# EAGLE board V3.1_Radio_Stack_Breakout_System_v46 (EAGLE 9.7.0), part 1 of 2
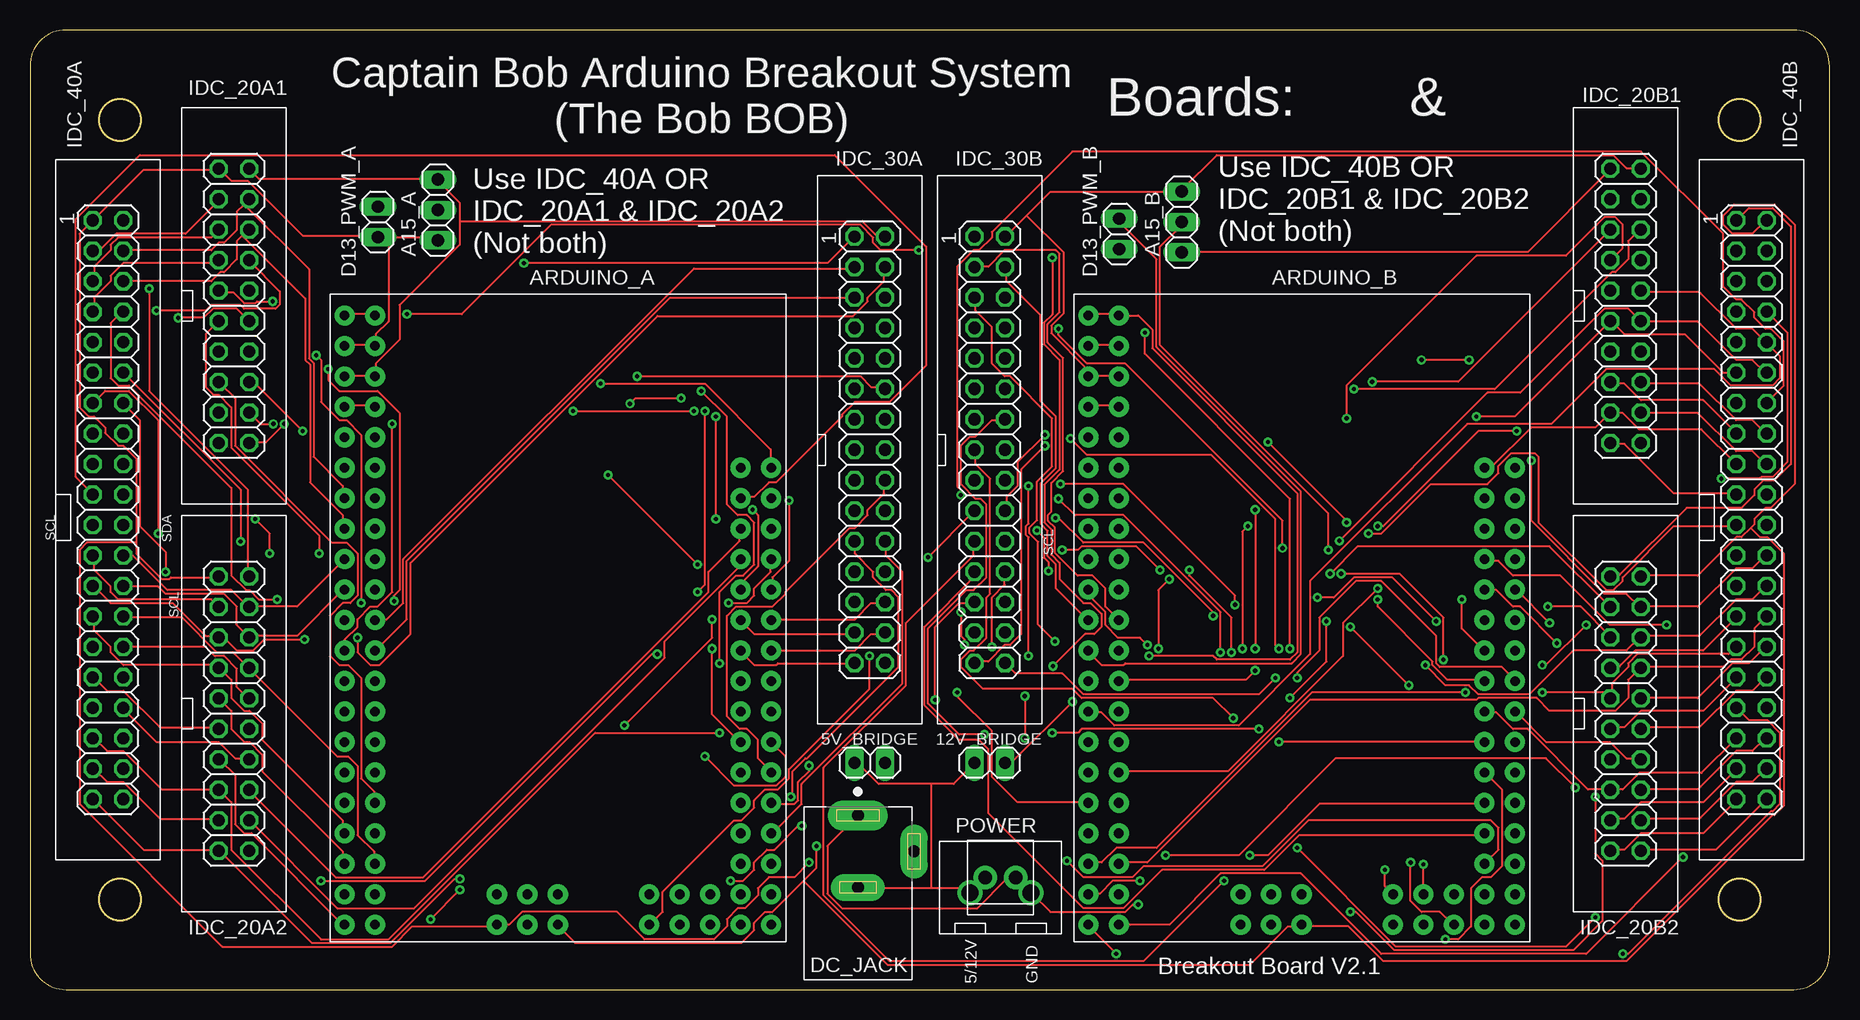
[diagram p0: board, top side]
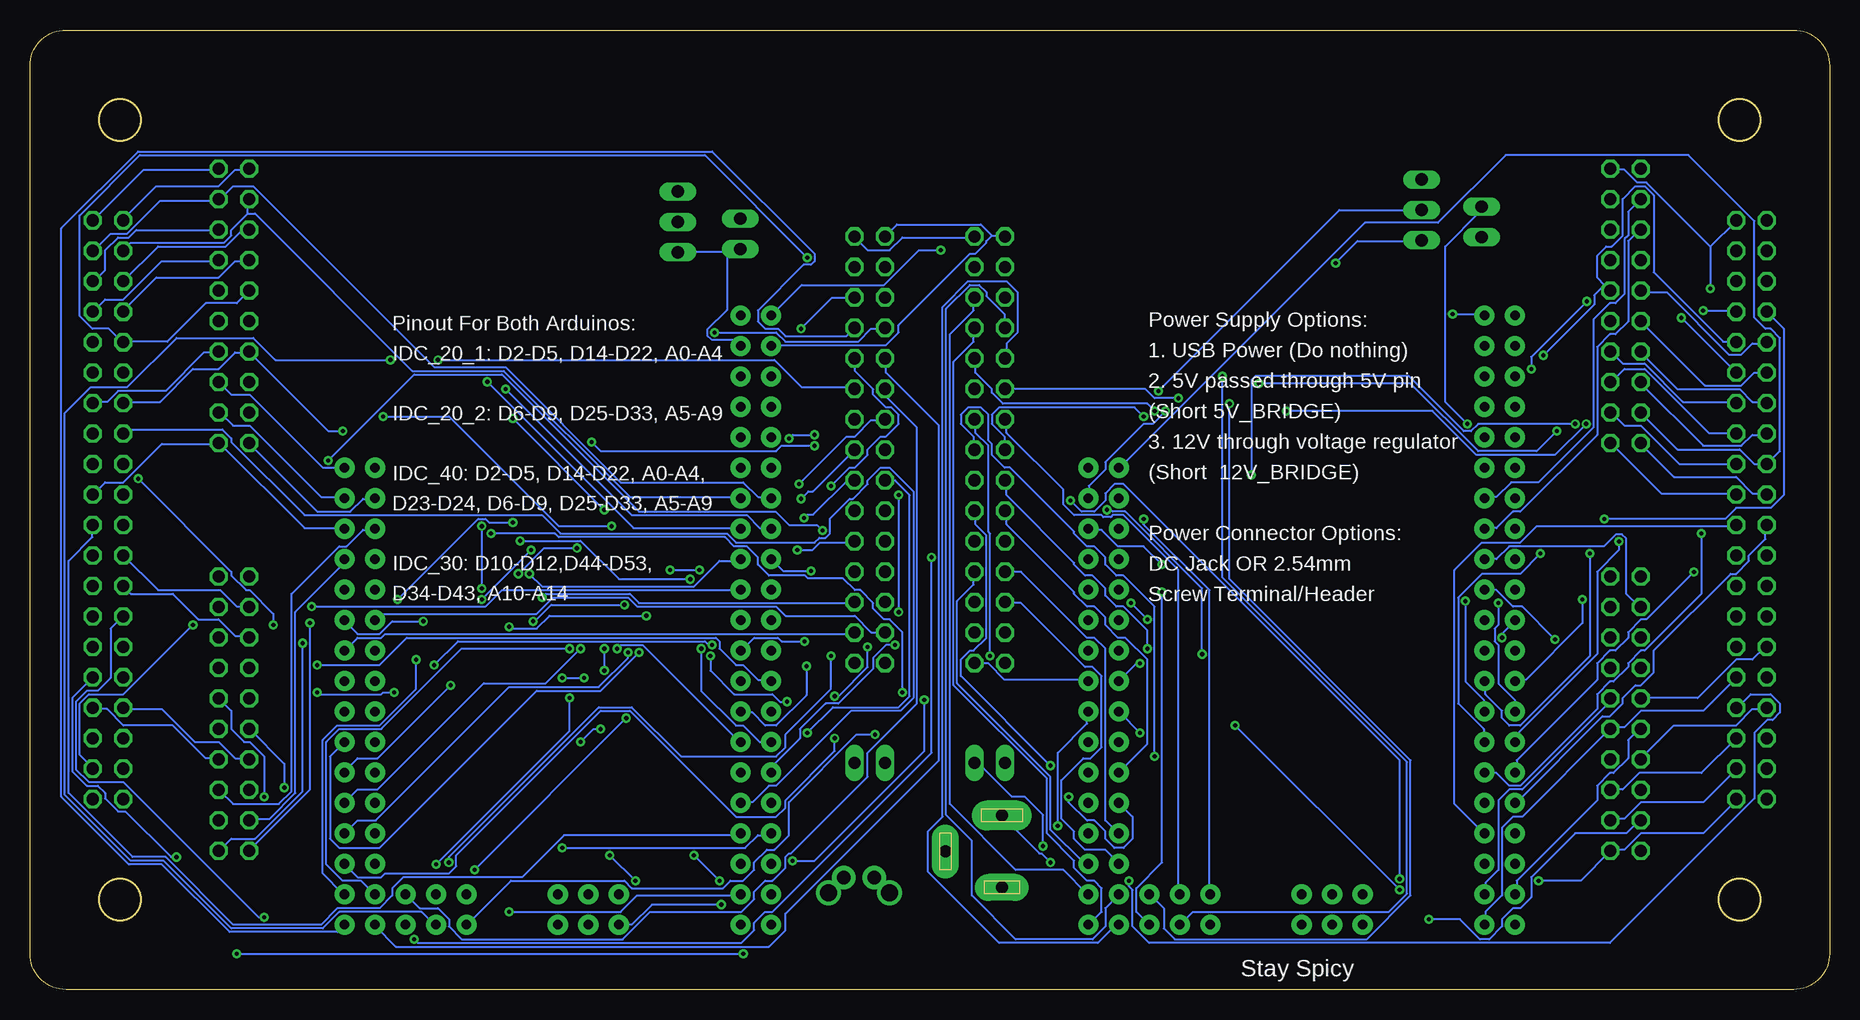
[diagram p1: board, bottom side, seen from below]

Size 150 x 80 mm. Coordinates in mm from the lower left corner, seen from the top.
Outline: 147,0 arc90 150,3 150,77 arc90 147,80 3,80 arc90 0,77 0,3 arc90 3,0 147,0
Outline: circle at 7.5,7.5 radius 1.75
Outline: circle at 142.5,72.5 radius 1.75
Outline: circle at 142.5,7.5 radius 1.75
Outline: circle at 7.5,72.5 radius 1.75
Copper layers (1*16): Top 0.035mm / dielectric 1.5mm / Bottom 0.035mm
Design rules "Fusion Electronics Design Rules": minimum track width 6mil, minimum drill 0.35mm, track to track 6mil, track to pad 6mil, pad to pad 6mil, via to via 6mil, smd to smd 6mil, copper to edge 40mil, drill to drill 6mil, minimum pad ring 10mil, minimum via ring 8mil, stop-mask expansion 4mil, vias tented up to drill 0mil, thermal gap 10mil

## Footprints (pad centres in the part's own frame; a part is rotated, then mirrored left to right if it is on the bottom)
1X02 = drill 1.016 long: 1 -1.27,0; 2 1.27,0
1X03 = drill 1.016 long: 1 -2.54,0; 2 0,0; 3 2.54,0
MODULE_MEGA_PRO_EMBED_CH340G_/_ATMEGA2560 = drill 0.8 pad 1.676: 3V3_1 -17.58,-17.78; 3V3_2 -17.58,-15.24; 5V_1 -20.12,-17.78; 5V_2 -20.12,-15.24; 5V_3 25.6,0; A0 -12.5,17.78; A1 -12.5,15.24; A2 -9.96,17.78; A3 -9.96,15.24; A4 -7.42,17.78; A5 -7.42,15.24; A6 -4.88,17.78; A7 -4.88,15.24; A8 -2.34,17.78; A9 -2.34,15.24; A10 0.2,17.78; A11 0.2,15.24; A12 2.74,17.78; A13 2.74,15.24; A14 5.28,17.78; A15 5.28,15.24; AREF -15.04,-15.24; D2 -9.96,-15.24; D3 -9.96,-17.78; D4 -7.42,-15.24; D5 -7.42,-17.78; D6 -4.88,-15.24; D7 -4.88,-17.78; D8 -2.34,-15.24; D9 -2.34,-17.78; D10 0.2,-15.24; D11 0.2,-17.78; D12 2.74,-15.24; D13 2.74,-17.78; D14 5.28,-15.24; D15 5.28,-17.78; D16 7.82,-15.24; D17 7.82,-17.78; D18 10.36,-15.24; D19 10.36,-17.78; D20 12.9,-15.24; D21 12.9,-17.78; D22 15.44,-15.24; D23 15.44,-17.78; D24 17.98,-15.24; D25 17.98,-17.78; D26 20.52,-15.24; D27 20.52,-17.78; D28 23.06,-15.24; D29 23.06,-17.78; D30 25.6,-15.24; D31 25.6,-17.78; D32 7.82,17.78; D33 7.82,15.24; D34 10.36,17.78; D35 10.36,15.24; D36 12.9,17.78; D37 12.9,15.24; D38 15.44,17.78; D39 15.44,15.24; D40 17.98,17.78; D41 17.98,15.24; D42 20.52,17.78; D43 20.52,15.24; D44 23.06,17.78; D45 23.06,15.24; D46 25.6,17.78; D47 25.6,15.24; D48 25.6,12.7; D49 23.06,12.7; D50 25.6,10.16; D51 23.06,10.16; D52 25.6,7.62; D53 23.06,7.62; GND_1 -22.66,-17.78; GND_2 -22.66,-15.24; GND_3 25.6,-5.08; MISO 23.06,0; MOSI 25.6,-2.54; RESET 23.06,-5.08; RST -15.04,-17.78; RX -12.5,-15.24; SCK 23.06,-2.54; TX -12.5,-17.78; VIN_1 -25.2,-17.78; VIN_2 -25.2,-15.24
CUI_PJ-002AH = drill 1 pad 2.5 long: 1 0,0 | drill 1 pad 2.25 long: 2 6,0; 3 3,4.7
2X10 = drill 1.016 octagon: 1 -11.43,-1.27; 2 -11.43,1.27; 3 -8.89,-1.27; 4 -8.89,1.27; 5 -6.35,-1.27; 6 -6.35,1.27; 7 -3.81,-1.27; 8 -3.81,1.27; 9 -1.27,-1.27; 10 -1.27,1.27; 11 1.27,-1.27; 12 1.27,1.27; 13 3.81,-1.27; 14 3.81,1.27; 15 6.35,-1.27; 16 6.35,1.27; 17 8.89,-1.27; 18 8.89,1.27; 19 11.43,-1.27; 20 11.43,1.27
2X15_IDC_30 = drill 1.016 octagon: 1 -17.78,-1.27; 2 -17.78,1.27; 3 -15.24,-1.27; 4 -15.24,1.27; 5 -12.7,-1.27; 6 -12.7,1.27; 7 -10.16,-1.27; 8 -10.16,1.27; 9 -7.62,-1.27; 10 -7.62,1.27; 11 -5.08,-1.27; 12 -5.08,1.27; 13 -2.54,-1.27; 14 -2.54,1.27; 15 0,-1.27; 16 0,1.27; 17 2.54,-1.27; 18 2.54,1.27; 19 5.08,-1.27; 20 5.08,1.27; 21 7.62,-1.27; 22 7.62,1.27; 23 10.16,-1.27; 24 10.16,1.27; 25 12.7,-1.27; 26 12.7,1.27; 27 15.24,-1.27; 28 15.24,1.27; 29 17.78,-1.27; 30 17.78,1.27
IDC_40_2X20 = drill 1.016 octagon: 1 -24.13,-1.27; 2 -24.13,1.27; 3 -21.59,-1.27; 4 -21.59,1.27; 5 -19.05,-1.27; 6 -19.05,1.27; 7 -16.51,-1.27; 8 -16.51,1.27; 9 -13.97,-1.27; 10 -13.97,1.27; 11 -11.43,-1.27; 12 -11.43,1.27; 13 -8.89,-1.27; 14 -8.89,1.27; 15 -6.35,-1.27; 16 -6.35,1.27; 17 -3.81,-1.27; 18 -3.81,1.27; 19 -1.27,-1.27; 20 -1.27,1.27; 21 1.27,-1.27; 22 1.27,1.27; 23 3.81,-1.27; 24 3.81,1.27; 25 6.35,-1.27; 26 6.35,1.27; 27 8.89,-1.27; 28 8.89,1.27; 29 11.43,-1.27; 30 11.43,1.27; 31 13.97,-1.27; 32 13.97,1.27; 33 16.51,-1.27; 34 16.51,1.27; 35 19.05,-1.27; 36 19.05,1.27; 37 21.59,-1.27; 38 21.59,1.27; 39 24.13,-1.27; 40 24.13,1.27
1X2_2.54&5.08MM = drill 1.15 pad 1.93: 1 1.27,-1.27; 2 -1.27,-1.27 | drill 1.4: P$1 2.54,-2.54; P$2 -2.54,-2.54

## Placement (x,y rotation side)
5V_BRIDGE  [1X02]  70,18.9 0 top
12V_BRIDGE  [1X02]  80,18.9 180 top
A15_A  [1X03]  34,65 90 top
A15_B  [1X03]  96,64 90 top
ARDUINO_A  MEGA_PRO_EMBED_CH340G_/_ATMEGA2560  [MODULE_MEGA_PRO_EMBED_CH340G_/_ATMEGA2560]  44,31 270 top
ARDUINO_B  MEGA_PRO_EMBED_CH340G_/_ATMEGA2560  [MODULE_MEGA_PRO_EMBED_CH340G_/_ATMEGA2560]  106,31 270 top
D13_PWM_A  [1X02]  29,64 90 top
D13_PWM_B  [1X02]  90.8,63 90 top
DC_JACK  DC-PJ-002AH_DC_JACK  [CUI_PJ-002AH]  69,14.52 270 top
IDC_20A1  [2X10]  17,57 270 top
IDC_20A2  [2X10]  17,23 270 top
IDC_20B1  [2X10]  133,57 270 top
IDC_20B2  [2X10]  133,23 270 top
IDC_30A  [2X15_IDC_30]  70,45 270 top
IDC_30B  [2X15_IDC_30]  80,45 270 top
IDC_40A  IDC_40_PINHD-2X20  [IDC_40_2X20]  6.5,40 270 top
IDC_40B  IDC_40_PINHD-2X20  [IDC_40_2X20]  143.5,40 270 top
POWER  2.54MMAND5.08MM_SCREW_TERMINAL2.54&5.08  [1X2_2.54&5.08MM]  80.9,10.6 0 top

## Library data of the parts
5V_BRIDGE 12V_BRIDGE A15_A A15_B D13_PWM_A D13_PWM_B = pinhead
ARDUINO_A ARDUINO_B = SnapEDA Library; MANUFACTURER: Robotdyn; PARTREV: 12/May/2017; STANDARD: Manufacturer Recommendations
DC_JACK = CaptainBobSim Library, custom; MANUFACTURER: CUI INC; STANDARD: Manufacturer recommendations
IDC_20A1 IDC_20A2 IDC_20B1 IDC_20B2 IDC_30A IDC_30B POWER = CaptainBobSim Library, custom
IDC_40A IDC_40B = CaptainBobSim Library, custom; CATEGORY: Headers; DESCRIPTION: Header, Straight, 2x20 Position; MANUFACTURER: Generic; MPN: Generic; OPERATING_TEMPERATURE: Generic; PART_STATUS: Active; PITCH: 0.100" (2.54mm); ROHS_COMPLIANCE: Generic; SERIES: Generic; SUB-CATEGORY: Headers, Male Pins; TYPE: Board to Board or Cable, Unshrouded, Through Hole, Straight

## Nets
+5V: 5V_BRIDGE.2 A15_A.3 A15_B.3 ARDUINO_A.5V_1 ARDUINO_A.5V_2 ARDUINO_A.5V_3 ARDUINO_B.5V_1 ARDUINO_B.5V_2 ARDUINO_B.5V_3 IDC_20A1.2 IDC_20A2.2 IDC_20B1.2 IDC_20B2.2 IDC_30A.2 IDC_30B.2 IDC_40A.2 IDC_40B.2
+12V: 12V_BRIDGE.1 ARDUINO_A.VIN_1 ARDUINO_A.VIN_2 ARDUINO_B.VIN_1 ARDUINO_B.VIN_2
A_3V3: ARDUINO_A.3V3_1 ARDUINO_A.3V3_2
A_A0: ARDUINO_A.A0 IDC_20A1.16 IDC_40A.16
A_A1: ARDUINO_A.A1 IDC_20A1.17 IDC_40A.17
A_A2: ARDUINO_A.A2 IDC_20A1.18 IDC_40A.18
A_A3: ARDUINO_A.A3 IDC_20A1.19 IDC_40A.19
A_A4: ARDUINO_A.A4 IDC_20A1.20 IDC_40A.20
A_A5: ARDUINO_A.A5 IDC_20A2.16 IDC_40A.36
A_A6: ARDUINO_A.A6 IDC_20A2.17 IDC_40A.37
A_A7: ARDUINO_A.A7 IDC_20A2.18 IDC_40A.38
A_A8: ARDUINO_A.A8 IDC_20A2.19 IDC_40A.39
A_A9: ARDUINO_A.A9 IDC_20A2.20 IDC_40A.40
A_A10: ARDUINO_A.A10 IDC_30A.26
A_A11: ARDUINO_A.A11 IDC_30A.27
A_A12: ARDUINO_A.A12 IDC_30A.28
A_A13: ARDUINO_A.A13 IDC_30A.29
A_A14: ARDUINO_A.A14 IDC_30A.30
A_A15: A15_A.2 ARDUINO_A.A15
A_AREF: ARDUINO_A.AREF
A_D2: ARDUINO_A.D2 IDC_20A1.3 IDC_40A.3
A_D3: ARDUINO_A.D3 IDC_20A1.4 IDC_40A.4
A_D4: ARDUINO_A.D4 IDC_20A1.5 IDC_40A.5
A_D5: ARDUINO_A.D5 IDC_20A1.6 IDC_40A.6
A_D6: ARDUINO_A.D6 IDC_20A2.3 IDC_40A.23
A_D7: ARDUINO_A.D7 IDC_20A2.4 IDC_40A.24
A_D8: ARDUINO_A.D8 IDC_20A2.5 IDC_40A.25
A_D9: ARDUINO_A.D9 IDC_20A2.6 IDC_40A.26
A_D10: ARDUINO_A.D10 IDC_30A.3
A_D11: ARDUINO_A.D11 IDC_30A.4
A_D12: ARDUINO_A.D12 IDC_30A.5
A_D13: ARDUINO_A.D13 D13_PWM_A.2
A_D14: ARDUINO_A.D14 IDC_20A1.7 IDC_40A.7
A_D15: ARDUINO_A.D15 IDC_20A1.8 IDC_40A.8
A_D16: ARDUINO_A.D16 IDC_20A1.9 IDC_40A.9
A_D17: ARDUINO_A.D17 IDC_20A1.10 IDC_40A.10
A_D18: ARDUINO_A.D18 IDC_20A1.11 IDC_40A.11
A_D19: ARDUINO_A.D19 IDC_20A1.12 IDC_40A.12
A_D20: ARDUINO_A.D20 IDC_20A1.13 IDC_40A.13
A_D21: ARDUINO_A.D21 IDC_20A1.14 IDC_40A.14
A_D22: ARDUINO_A.D22 IDC_20A1.15 IDC_40A.15
A_D23: ARDUINO_A.D23 IDC_40A.21
A_D24: ARDUINO_A.D24 IDC_40A.22
A_D25: ARDUINO_A.D25 IDC_20A2.7 IDC_40A.27
A_D26: ARDUINO_A.D26 IDC_20A2.8 IDC_40A.28
A_D27: ARDUINO_A.D27 IDC_20A2.9 IDC_40A.29
A_D28: ARDUINO_A.D28 IDC_20A2.10 IDC_40A.30
A_D29: ARDUINO_A.D29 IDC_20A2.11 IDC_40A.31
A_D30: ARDUINO_A.D30 IDC_20A2.12 IDC_40A.32
A_D31: ARDUINO_A.D31 IDC_20A2.13 IDC_40A.33
A_D32: ARDUINO_A.D32 IDC_20A2.14 IDC_40A.34
A_D33: ARDUINO_A.D33 IDC_20A2.15 IDC_40A.35
A_D34: ARDUINO_A.D34 IDC_30A.16
A_D35: ARDUINO_A.D35 IDC_30A.17
A_D36: ARDUINO_A.D36 IDC_30A.18
A_D37: ARDUINO_A.D37 IDC_30A.19
A_D38: ARDUINO_A.D38 IDC_30A.20
A_D39: ARDUINO_A.D39 IDC_30A.21
A_D40: ARDUINO_A.D40 IDC_30A.22
A_D41: ARDUINO_A.D41 IDC_30A.23
A_D42: ARDUINO_A.D42 IDC_30A.24
A_D43: ARDUINO_A.D43 IDC_30A.25
A_D44: ARDUINO_A.D44 IDC_30A.6
A_D45: ARDUINO_A.D45 IDC_30A.7
A_D46: ARDUINO_A.D46 IDC_30A.8
A_D47: ARDUINO_A.D47 IDC_30A.9
A_D48: ARDUINO_A.D48 IDC_30A.10
A_D49: ARDUINO_A.D49 IDC_30A.11
A_D50: ARDUINO_A.D50 IDC_30A.12
A_D51: ARDUINO_A.D51 IDC_30A.13
A_D52: ARDUINO_A.D52 IDC_30A.14
A_D53: ARDUINO_A.D53 IDC_30A.15
A_MISO: ARDUINO_A.MISO
A_MOSI: ARDUINO_A.MOSI
A_RESET: ARDUINO_A.RESET
A_RST: ARDUINO_A.RST
A_RX: ARDUINO_A.RX
A_SCK: ARDUINO_A.SCK
A_TX: ARDUINO_A.TX
B_3V3: ARDUINO_B.3V3_1 ARDUINO_B.3V3_2
B_A0: ARDUINO_B.A0 IDC_20B1.16 IDC_40B.16
B_A1: ARDUINO_B.A1 IDC_20B1.17 IDC_40B.17
B_A2: ARDUINO_B.A2 IDC_20B1.18 IDC_40B.18
B_A3: ARDUINO_B.A3 IDC_20B1.19 IDC_40B.19
B_A4: ARDUINO_B.A4 IDC_20B1.20 IDC_40B.20
B_A5: ARDUINO_B.A5 IDC_20B2.16 IDC_40B.36
B_A6: ARDUINO_B.A6 IDC_20B2.17 IDC_40B.37
B_A7: ARDUINO_B.A7 IDC_20B2.18 IDC_40B.38
B_A8: ARDUINO_B.A8 IDC_20B2.19 IDC_40B.39
B_A9: ARDUINO_B.A9 IDC_20B2.20 IDC_40B.40
B_A10: ARDUINO_B.A10 IDC_30B.26
B_A11: ARDUINO_B.A11 IDC_30B.27
B_A12: ARDUINO_B.A12 IDC_30B.28
B_A13: ARDUINO_B.A13 IDC_30B.29
B_A14: ARDUINO_B.A14 IDC_30B.30
B_A15: A15_B.2 ARDUINO_B.A15
B_AREF: ARDUINO_B.AREF
B_D2: ARDUINO_B.D2 IDC_20B1.3 IDC_40B.3
B_D3: ARDUINO_B.D3 IDC_20B1.4 IDC_40B.4
B_D4: ARDUINO_B.D4 IDC_20B1.5 IDC_40B.5
B_D5: ARDUINO_B.D5 IDC_20B1.6 IDC_40B.6
B_D6: ARDUINO_B.D6 IDC_20B2.3 IDC_40B.23
B_D7: ARDUINO_B.D7 IDC_20B2.4 IDC_40B.24
B_D8: ARDUINO_B.D8 IDC_20B2.5 IDC_40B.25
B_D9: ARDUINO_B.D9 IDC_20B2.6 IDC_40B.26
B_D10: ARDUINO_B.D10 IDC_30B.3
B_D11: ARDUINO_B.D11 IDC_30B.4
B_D12: ARDUINO_B.D12 IDC_30B.5
B_D13: ARDUINO_B.D13 D13_PWM_B.2
B_D14: ARDUINO_B.D14 IDC_20B1.7 IDC_40B.7
B_D15: ARDUINO_B.D15 IDC_20B1.8 IDC_40B.8
B_D16: ARDUINO_B.D16 IDC_20B1.9 IDC_40B.9
B_D17: ARDUINO_B.D17 IDC_20B1.10 IDC_40B.10
B_D18: ARDUINO_B.D18 IDC_20B1.11 IDC_40B.11
B_D19: ARDUINO_B.D19 IDC_20B1.12 IDC_40B.12
B_D20: ARDUINO_B.D20 IDC_20B1.13 IDC_40B.13
B_D21: ARDUINO_B.D21 IDC_20B1.14 IDC_40B.14
B_D22: ARDUINO_B.D22 IDC_20B1.15 IDC_40B.15
B_D23: ARDUINO_B.D23 IDC_40B.21
B_D24: ARDUINO_B.D24 IDC_40B.22
B_D25: ARDUINO_B.D25 IDC_20B2.7 IDC_40B.27
B_D26: ARDUINO_B.D26 IDC_20B2.8 IDC_40B.28
B_D27: ARDUINO_B.D27 IDC_20B2.9 IDC_40B.29
B_D28: ARDUINO_B.D28 IDC_20B2.10 IDC_40B.30
B_D29: ARDUINO_B.D29 IDC_20B2.11 IDC_40B.31
B_D30: ARDUINO_B.D30 IDC_20B2.12 IDC_40B.32
B_D31: ARDUINO_B.D31 IDC_20B2.13 IDC_40B.33
B_D32: ARDUINO_B.D32 IDC_20B2.14 IDC_40B.34
B_D33: ARDUINO_B.D33 IDC_20B2.15 IDC_40B.35
B_D34: ARDUINO_B.D34 IDC_30B.16
B_D35: ARDUINO_B.D35 IDC_30B.17
B_D36: ARDUINO_B.D36 IDC_30B.18
B_D37: ARDUINO_B.D37 IDC_30B.19
B_D38: ARDUINO_B.D38 IDC_30B.20
B_D39: ARDUINO_B.D39 IDC_30B.21
B_D40: ARDUINO_B.D40 IDC_30B.22
B_D41: ARDUINO_B.D41 IDC_30B.23
B_D42: ARDUINO_B.D42 IDC_30B.24
B_D43: ARDUINO_B.D43 IDC_30B.25
B_D44: ARDUINO_B.D44 IDC_30B.6
B_D45: ARDUINO_B.D45 IDC_30B.7
B_D46: ARDUINO_B.D46 IDC_30B.8
B_D47: ARDUINO_B.D47 IDC_30B.9
B_D48: ARDUINO_B.D48 IDC_30B.10
B_D49: ARDUINO_B.D49 IDC_30B.11
B_D50: ARDUINO_B.D50 IDC_30B.12
B_D51: ARDUINO_B.D51 IDC_30B.13
B_D52: ARDUINO_B.D52 IDC_30B.14
B_D53: ARDUINO_B.D53 IDC_30B.15
B_MISO: ARDUINO_B.MISO
B_MOSI: ARDUINO_B.MOSI
B_RESET: ARDUINO_B.RESET
B_RST: ARDUINO_B.RST
B_RX: ARDUINO_B.RX
B_SCK: ARDUINO_B.SCK
B_TX: ARDUINO_B.TX
GND: A15_A.1 A15_B.1 ARDUINO_A.GND_1 ARDUINO_A.GND_2 ARDUINO_A.GND_3 ARDUINO_B.GND_1 ARDUINO_B.GND_2 ARDUINO_B.GND_3 D13_PWM_A.1 D13_PWM_B.1 DC_JACK.1 IDC_20A1.1 IDC_20A2.1 IDC_20B1.1 IDC_20B2.1 IDC_30A.1 IDC_30B.1 IDC_40A.1 IDC_40B.1 POWER.1 POWER.P$1
N$2: 5V_BRIDGE.1 12V_BRIDGE.2 DC_JACK.2 POWER.2 POWER.P$2